# Altium PCB vnhsp30x3v3.PcbDoc
Units mil, origin at the board's own origin, x right, y up, seen from the top; angles counter-clockwise.
Board outline 3673.03 x 2151.03 mil, 2 copper layers (Top Layer, Bottom Layer); 72 components, 60 nets, 306 pads, 152 vias.
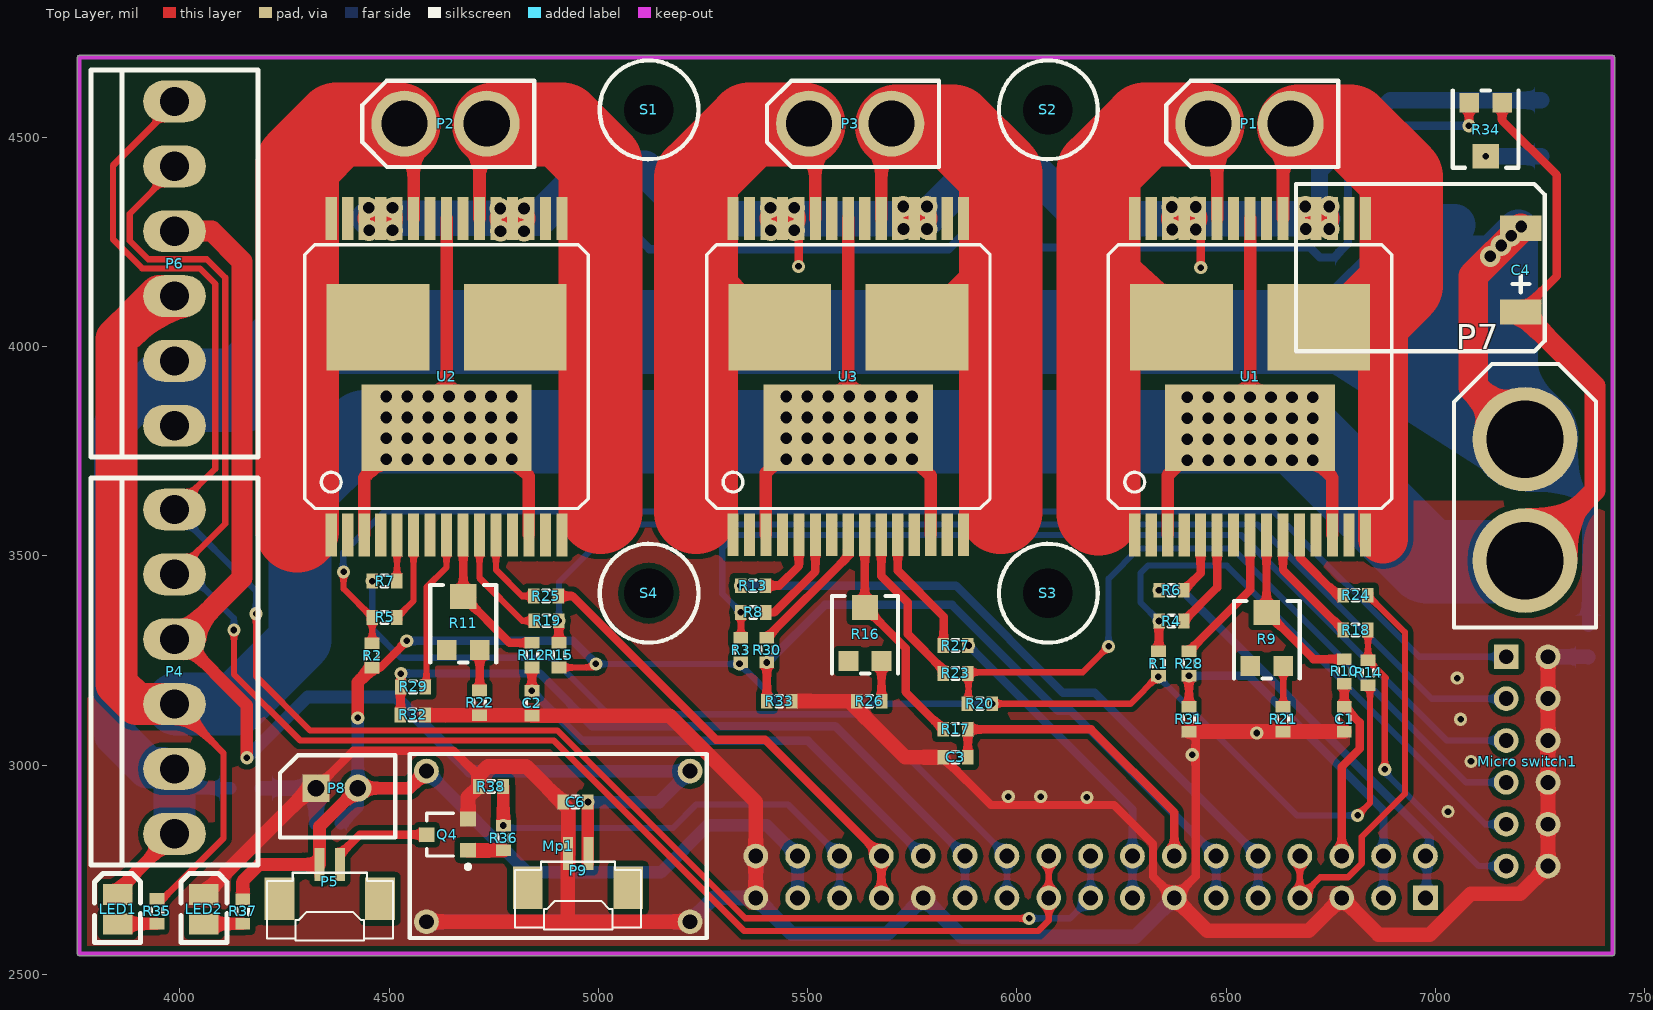
[diagram p0: Top Layer view]
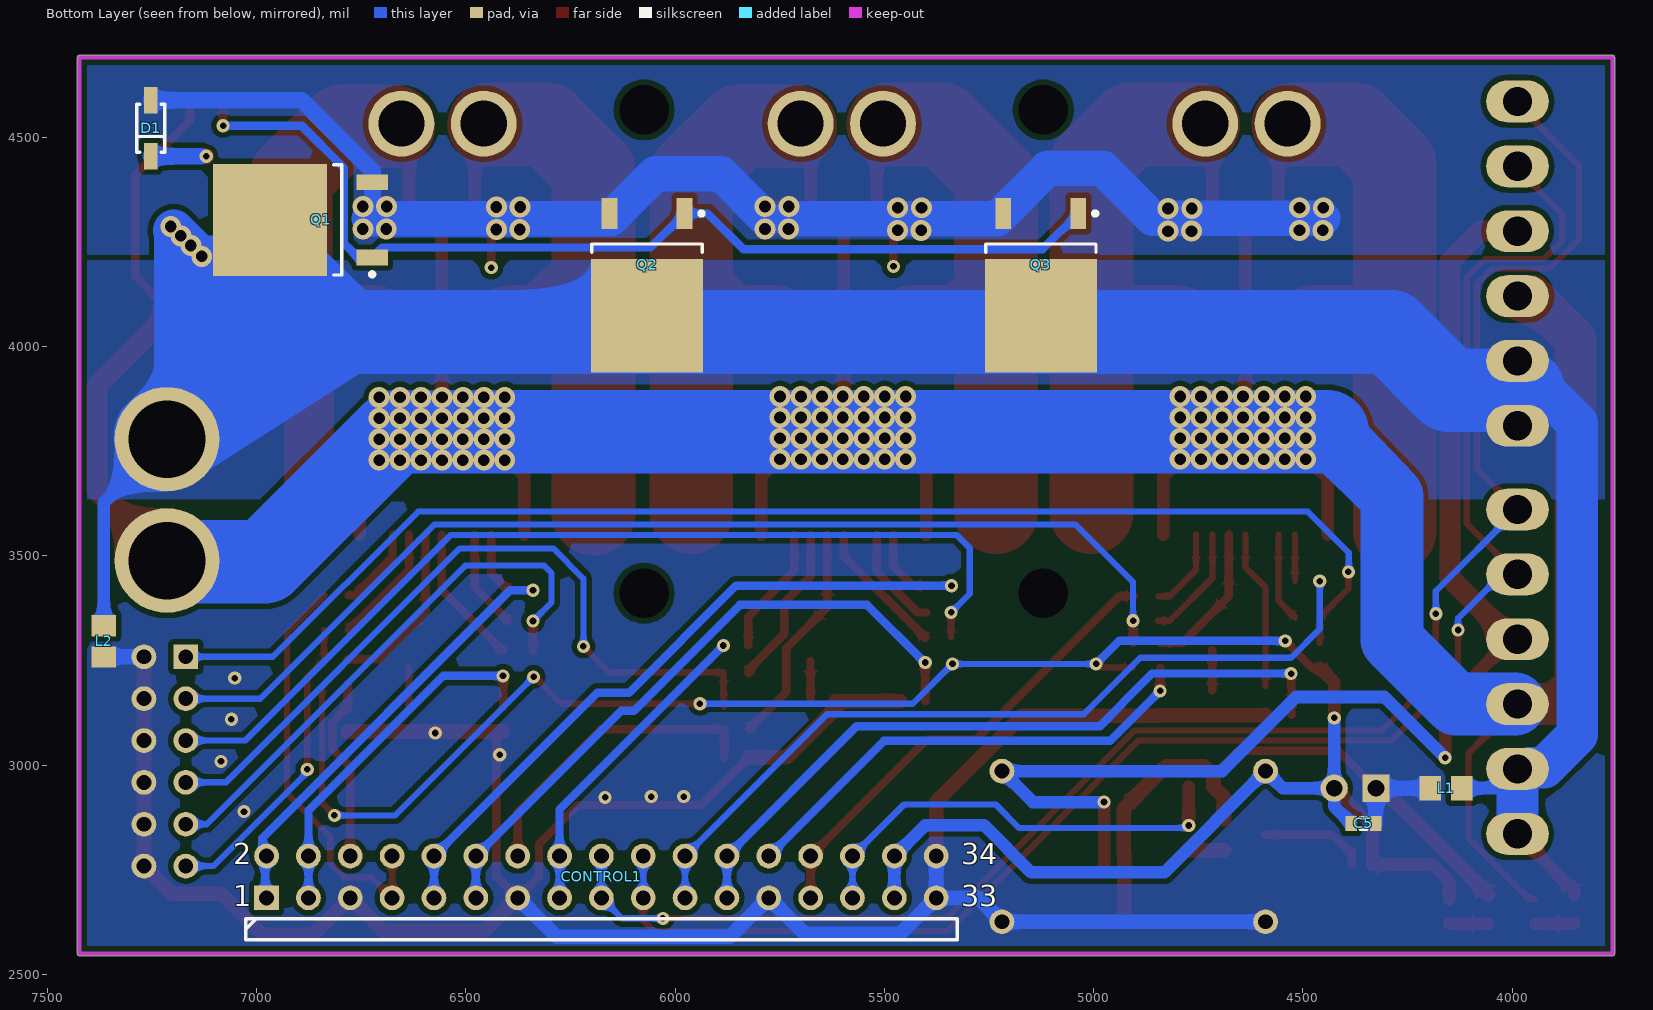
[diagram p1: Bottom Layer view, seen from below]

## Layer stack, top to bottom
Top Solder: solder mask 0.4, Solder Resist, Dk 3.5
Top Layer: signal copper 1.4
Dielectric 1: dielectric 12.6, FR-4, Dk 4.8
Bottom Layer: signal copper 1.4
Bottom Solder: solder mask 0.4, Solder Resist, Dk 3.5

## Board outline
3754.99,2550 ccw(c3760,2550) 3760,2544.99 7423,2544.99 ccw(c7423,2550) 7428.02,2550 7428.02,4691 ccw(c7423,4691) 7423,4696.02 3760,4696.02 ccw(c3760,4691) 3754.99,4691

## Design rules (kind name [scope] priority, off if disabled: settings)
AssemblyTestPointUsage [All] p1 off:
AssemblyTestpoint [All] p1 off: testpointundercomponent=TRUE minsize=40 maxsize=100 preferedsize=60 minholesize=0 maxholesize=40 preferedholesize=32 testpointgrid=1 usegrid=TRUE gridtolerance=0.01 allowsidetop=TRUE allowsidebottom=TRUE
Clearance Clearance_1 [All vs InPolygon] p1: gap=13 ignorepadtopadclearanceinfootprint=FALSE except(0: Arc-Hole Track-Hole SMDPad-Hole THPad-Hole Via-Hole Fill-Hole Poly-Hole Region-Hole Text-Hole)
Clearance [All] p2: gap=7 ignorepadtopadclearanceinfootprint=FALSE except(0: Arc-Hole Track-Hole SMDPad-Hole THPad-Hole Via-Hole Fill-Hole Poly-Hole Region-Hole Text-Hole)
ComponentClearance [All] p1 off: gap=10 collisioncheckmode=3 verticalgap=10 showdistances=FALSE
FabricationTestPointUsage [All] p1 off: valid=0 allowmultiple=FALSE
FabricationTestpoint [All] p1 off: side=3 testpointundercomponent=TRUE minsize=40 maxsize=100 preferedsize=60 minholesize=0 maxholesize=40 preferedholesize=32 testpointgrid=1 allowsidetop=TRUE allowsidebottom=TRUE usegrid=TRUE gridtolerance=0.01
Height [All] p1 off: minheight=0 maxheight=1000 prefheight=500
HoleSize [All] p1 off: absolutevalues=TRUE maxlimit=100 minlimit=1 maxpercent=80.000 minpercent=20.000
HoleToHoleClearance [All] p1 off: gap=10 allowstackedmicrovias=TRUE
LayerPairs [All] p1 off: enforce=TRUE
MinimumSolderMaskSliver [All] p1 off: minsoldermaskwidth=10
NetAntennae [All] p1 off: netantennaetolerance=0
PasteMaskExpansion [All] p1 off: expansion=0
PlaneConnect [All] p1: planeconnectstyle=Direct reliefexpansion=20 reliefentries=4 reliefconductorwidth=10 reliefairgap=10
PolygonConnect [All] p1: connectstyle=Direct reliefconductorwidth=10 reliefentries=4 polygonreliefangle="90 Angle" airgapwidth=10
RoutingVias [All] p1: holewidth=15.75 width=31.5 viastyle="Through Hole" minholewidth=11.81 minwidth=23.62 maxholewidth=28 maxwidth=50
SilkToSilkClearance [All] p1 off: silktosilkclearance=10
SilkToSolderMaskClearance [IsPad] p1 off: minsilkscreentomaskgap=10 clearancetoexposedcopper=TRUE
SolderMaskExpansion [All] p1 off: expansion=4
Width [All] p1: maxlimit=500 minlimit=10 preferedwidth=10
15 further rules are at their usual default settings.

## Components (designator, comment, footprint, x,y, rotation, side; value= is the part's Value field where it differs from the comment)
C1 "33nF" J1-0603 6782,3110 r90 top
C2 "33nF" J1-0603 4841,3148 r90 top
C3 "33nF" J1-0603 5853,3019 r0 top
C4 "Cap Pol1" "CAP 470uf sleep smd" 7013,4186 r90 top
C5 "100nF" J1-0603 4355,2861 r0 bottom
C6 "100nF" J1-0603 4945,2912 r0 top
CONTROL1 "" HDR2X17H 6976,2683 r180 bottom
D1 "BZT52C3V0" SOD123 7253,4522.07 r270 bottom
L1 "" 2012[0805] 4158,2945 r0 bottom
L2 "" 2012[0805] 7365,3296 r270 bottom
LED1 "power" 3518 3851,2656 r90 top
LED2 "power" 3518 4057,2656 r90 top
"Micro switch1" "" HDR2X6H 7169,3259 r270 top
Mp1 "Mp1584" mp1584-1.8 5258.92,3026 r180 top locked
P1 "XT30" xt-30 6354.79,4635.36 r270 top
P2 "XT30" xt-30 4433.79,4635.36 r270 top
P3 "XT30" xt-30 5400.64,4635.36 r270 top
P4 "BUS connector" CON6-TIWAN 3987,3223.5 r270 top
P5 "smd" "sheader 2" 4382.68,2762.69 r180 top
P6 "BUS connector" con6-tiwan 3987,4198.5 r270 top
P7 "XT60" XT-60 7207.4,3631.68 r180 top
P8 "jp_circular" "JP circular 2" 4325,2945 r0 top
P9 "smd" "sheader 2" 4976,2789 r180 top
Q1 "MOSFET-N" D-pack 6895,4303 r0 bottom
Q2 "MOSFET-N" D-pack 6067,4147 r270 bottom
Q3 "MOSFET-N" D-pack 5126,4147 r270 bottom
Q4 "2N2222" SOT-23 4639,2834 r90 top
R1 "Res1" j1-0603 6338,3243 r90 top
R2 "Res1" j1-0603 4459,3262 r90 top
R3 "Res1" j1-0603 5340,3275 r90 top
R4 "Res1" j1-0603 6369,3344.5 r0 top
R5 "Res1" j1-0603 4489,3353 r0 top
R6 "Res1" j1-0603 6369,3418 r0 top
R7 "Res1" j1-0603 4489,3440 r0 top
R8 "Res1" j1-0603 5370,3365 r0 top
R9 "pot" 35WR_TC33X-2-103E(Primary) 6597,3300 r0 top
R10 "Res1" j1-0603 6782,3224 r270 top
R11 "pot" 35WR_TC33X-2-103E(Primary) 4677,3338 r0 top
R12 "Res1" j1-0603 4840.94,3263 r270 top
R13 "Res1" j1-0603 5369,3429 r0 top
R14 "Res1" j1-0603 6839,3221 r90 top
R15 "Res1" j1-0603 4905.47,3263 r90 top
R16 "pot" 35WR_TC33X-2-103E(Primary) 5637,3312 r0 top
R17 "Res1" j1-0603 5853,3085.75 r0 top
R18 "Res1" j1-0603 6809,3323 r180 top
R19 "Res1" j1-0603 4876,3345 r180 top
R20 "Res1" j1-0603 5911,3147 r180 top
R21 "Res1" j1-0603 6636,3110 r270 top
R22 "Res1" j1-0603 4716,3149 r270 top
R23 "Res1" j1-0603 5853,3219.25 r180 top
R24 "Res1" j1-0603 6809,3406 r180 top
R25 "Res1" j1-0603 4874.53,3404 r180 top
R26 "Res1" j1-0603 5647,3153 r180 top
R27 "Res1" j1-0603 5853,3286 r180 top
R28 "Res1" j1-0603 6411,3243 r90 top
R29 "Res1" j1-0603 4557,3187 r0 top
R30 "Res1" j1-0603 5402,3275 r90 top
R31 "Res1" j1-0603 6411,3110 r270 top
R32 "Res1" j1-0603 4556,3120 r0 top
R33 "Res1" j1-0603 5432,3153 r0 top
R34 "20k" 35WR_TC33X-2-103E(Primary) 7120,4520 r180 top
R35 "Res1" j1-0603 3945,2651 r270 top
R36 "" j1-0603 4773,2826 r90 top
R37 "Res1" j1-0603 4150,2650.53 r270 top
R38 "" j1-0603 4743,2949 r180 top
S1 "Screw Hole" "Screw Holw 3-6 mm" 5121,4566 r0 top
S2 "Screw Hole" "Screw Holw 3-6 mm" 6075,4566 r0 top
S3 "Screw Hole" "Screw Holw 3-6 mm" 6075,3411 r0 top
S4 "Screw Hole" "Screw Holw 3-6 mm" 5121,3411 r0 top
U1 "VNH2SP30" MULTIPOWER30_VNH2SP30(Primary) 6557.02,3926.92 r270 top
U2 "VNH2SP30" MULTIPOWER30_VNH2SP30(Primary) 4637.02,3926.92 r270 top
U3 "VNH2SP30" MULTIPOWER30_VNH2SP30(Primary) 5597.02,3927 r270 top

## Footprints (in the part's own frame and the unit in brackets; to place one, negate y for a bottom-side part, rotate by r counter-clockwise, add the part's x,y. Pads: shape width x height; smd on the part's side, far side on the other; paste and mask are expansions set on the pad)
35WR_TC33X-2-103E(Primary) [mm]
  rect 1.2x1.2 smd paste-25.4 mask-25.4: 1(-1,-1.6) 3(1,-1.6)
  rect 1.6x1.5 smd paste-25.4 mask-25.4: 2(0,1.65)
  silkscreen extent -2,-2.35 2,2.35
2012[0805] [mm] "Chip Resistor; Body 2.0 x 1.3 mm (LxW typ)"
  rect 1.3x1.5 smd: 1(-0.95,0) 2(0.95,0)
  body extent -1.22,-0.75 1.28,0.75, height 0.5
3518 [mil]
  rect 50x70 smd: 1(35,0) 2(-35,0)
  silkscreen extent -80,-55 85,55, body extent -63,-31 63,32, height 43
"CAP 470uf sleep smd" [mil]
  rect 60x100 smd: 1(-103,-191) 2(97,-191)
  silkscreen extent -197,-248 203,346
CON6-TIWAN [mil]
  oval 100x150 hole 70: 1(-387.5,0) 2(-232.5,0) 3(-77.5,0) 4(77.5,0) 5(232.5,0) 6(387.5,0)
  silkscreen extent -463,-200 463,200
con6-tiwan [mil]
  oval 100x150 hole 70: 1(-387.5,0) 2(-232.5,0) 3(-77.5,0) 4(77.5,0) 5(232.5,0) 6(387.5,0)
  silkscreen extent -463,-200 463,200
D-pack [mm] "D-PAK, 3-Pads, Body 6.2x6.7mm (max), IPC Medium Density"
  rect 1.9x0.95 smd: 1(-4.35,2.28) 3(-4.35,-2.28)
  rect 6.9x6.8 smd: 4(1.85,0)
  silkscreen extent -4.47,-3.35 -2,3.43, body extent -2.5,-3.35 3.7,3.35, height 2.38
HDR2X6H [mm] "Connector; Header; 6x2 Position; Right Angle"
  rect 1.5x1.5 hole 0.9: 1(0,0)
  round 1.5 hole 0.9: 2(0,2.54) 3(2.54,0) 4(2.54,2.54) 5(5.08,0) 6(5.08,2.54) 7(7.62,0) 8(7.62,2.54) 9(10.16,0) 10(10.16,2.54) 11(12.7,0) 12(12.7,2.54)
HDR2X17H [mm] "Connector; Header; 17x2 Position; Right Angle"
  rect 1.5x1.5 hole 0.9: 1(0,0)
  round 1.5 hole 0.9: 2(0,2.54) 3(2.54,0) 4(2.54,2.54) 5(5.08,0) 6(5.08,2.54) 7(7.62,0) 8(7.62,2.54) 9(10.16,0) 10(10.16,2.54) 11(12.7,0) 12(12.7,2.54) 13(15.24,0) 14(15.24,2.54) 15(17.78,0) 16(17.78,2.54) 17(20.32,0) 18(20.32,2.54) 19(22.86,0) 20(22.86,2.54) 21(25.4,0) 22(25.4,2.54) 23(27.94,0) 24(27.94,2.54) 25(30.48,0) 26(30.48,2.54) 27(33.02,0) 28(33.02,2.54) 29(35.56,0) 30(35.56,2.54) 31(38.1,0) 32(38.1,2.54) 33(40.64,0) 34(40.64,2.54)
  silkscreen extent -1.27,-2.54 41.91,-1.27
J1-0603 [mm] "Chip Resistor, Body 1.6x0.8mm, IPC High Density"
  rect 0.7x0.9 smd: 1(-0.75,0) 2(0.75,0)
  silkscreen extent -0.2,-0.35 0.2,0.35, body extent -0.85,-0.48 0.85,0.48, height 0.9
j1-0603 [mm] "Chip Resistor, Body 1.6x0.8mm, IPC High Density"
  rect 0.7x0.9 smd: 1(-0.75,0) 2(0.75,0)
  silkscreen extent -0.2,-0.35 0.2,0.35, body extent -0.85,-0.48 0.85,0.48, height 0.9
"JP circular 2" [mil]
  rect 65x65 hole 40: 1(0,0)
  round 65 hole 40: 2(100,0)
  silkscreen extent -86,-118 190,79, body extent -96,-118 196,75, height 216
mp1584-1.8 [mm]
  round 1.5 hole 0.9: 1(1.016,10.16) 2(1.016,1.016) 3(17.016,10.16) 4(17.016,1.016)
  silkscreen extent 0,-0.03 18.03,11.15
MULTIPOWER30_VNH2SP30(Primary) [mm]
  rect 5.25x6.23 smd paste-25.4 mask-25.4: 35(-3.05,-4.165) 36(-3.05,4.165)
  rect 5.45x6.43 on Top Solder paste-25.4 mask-25.4: 35(-3.05,-4.165) 36(-3.05,4.165)
  rect 5.25x10.3 smd paste-25.4 mask-25.4: 37(3.05,0)
  rect 5.45x10.5 on Top Solder paste-25.4 mask-25.4: 37(3.05,0)
  rect 2.6x0.68 smd paste-25.4 mask-25.4: P$1(9.563,-7) P$2(9.563,-6) P$3(9.563,-5) P$4(9.563,-4) P$5(9.563,-3) P$6(9.563,-2) P$7(9.563,-1) P$8(9.563,0) P$9(9.563,1) P$10(9.563,2) P$11(9.563,3) P$12(9.563,4) P$13(9.563,5) P$14(9.563,6) P$15(9.563,7) P$16(-9.637,7) P$17(-9.637,6) P$18(-9.637,5) P$19(-9.637,4) P$20(-9.637,3) P$21(-9.637,2) P$22(-9.637,1) P$23(-9.637,0) P$24(-9.637,-1) P$25(-9.637,-2) P$26(-9.637,-3) P$27(-9.637,-4) P$28(-9.637,-5) P$29(-9.637,-6) P$30(-9.637,-7)
  silkscreen extent -8.04,-8.6 7.96,8.6
"Screw Holw 3-6 mm" [mil]
  round 0 hole 118.11: 0(-1,0)
  silkscreen extent -118,-118 118,118
"sheader 2" [mm]
  rect 1.8x2.6 smd: 0(-2.425,2.075) 0(3.675,2.075)
  rect 0.6x2 smd: 1(0,0) 2(1.25,0)
  silkscreen extent -3.2,0.5 4.45,4.62, body extent -3.2,-0.12 4.45,4.65, height 3.5
SOD123 [mm] "SOD-123; 2 Leads; Body 2.7 x 1.6 mm, (LxW)"
  rect 1.6x0.8 smd: 1(-1.7,0) 2(1.7,0)
  silkscreen extent -1.45,-0.85 1.45,0.85
SOT-23 [mm] "SOT-23; 3 Leads; Body 3.0 x 2.6 mm, inc. leads (LxW max)"
  rect 0.9x0.95 smd: 1(0,1.25) 2(-0.95,-1.25) 3(0.95,-1.25)
  silkscreen extent -2.07,-1.38 1.3,1.25, body extent -1.33,-0.38 1.33,1.25, height 2
xt-30 [mm]
  round 4 hole 2.8: +(2.6,7.6) -(2.6,2.6)
  silkscreen extent 0,0.05 5.23,10.49, body extent 0.01,0.01 5.26,10.46, height 13.5
XT-60 [mil]
  round 250 hole 185: +(-6.6,142.68) -(-6.6,-147.32)
  silkscreen extent -177,-327 163,303, body extent -162,-309 153,305, height 646

## Part data
C1 C2 C3 C5 C6: library part Cap, "Capacitor"
C4: "Polarized Capacitor (Radial)"
CONTROL1: library part "Header 17X2H", "Header, 17-Pin, Dual row, Right Angle"
D1: "Surface Mount Zener Diode"
L1 L2: library part Inductor, "Inductor"
LED1 LED2: library part LED3, "Typical BLUE SiC LED"
"Micro switch1": library part "Header 6X2H", "Header, 6-Pin, Dual row, Right Angle"
P1 P2 P3 P5 P7 P8 P9: library part "Header 2", "Header, 2-Pin"
P4 P6: library part "Header 6", "Header, 6-Pin"
Q1 Q2 Q3: "N-Channel MOSFET"
Q4: "NPN Bipolar Transistor"
R1 R2 R3 R4 R5 R6 R7 R8 R10 R12 R13 R14 R15 R17 R18 R19 R20 R21 R22 R23 R24 R25 R26 R27 R28 R29 R30 R31 R32 R33 R35 R37: "Resistor"
R9 R11 R16 R34: library part TC33X-2-103E
R36 R38: library part Res1, "Resistor"
U1 U2 U3: "Dip18"

## Via types
v1: diameter 50, hole 28, Top Layer to Bottom Layer, tented both sides, 112 vias
v2: diameter 31.5, hole 15.75, Top Layer to Bottom Layer, tented both sides, 40 vias

## Nets (pads, with @x,y where several pads share a name; then routed paths per layer and width w, separated by ;. In a path a pad name is that pad's centre, name@x,y a point inside that pad or via, vN(x,y) a via of type N, cw(c..) or ccw(c..) an arc to the next point about the centre after c; other vN are vias at no path point)
+5: C5.2 CONTROL1.31 CONTROL1.32 Mp1.4 P5.2 P8.2 R1.1 R2.1 R3.1 R14.1 R15.1 R20.1 R37.1 | length 5418.2
  Top Layer w15: R15.1 4985.47,3233.47 v2(4994,3242) ; v2(5940.53,3147) 6271.53,3147 R1.1 ; v2(6814,2880) 6843.5,2909.5 6843.5,3186.97 R14.1
  Top Layer w20: R2.1 4477.47,3232.47 v2(4542,3297)
  Top Layer w30: R37.1 4150,2723 4189.69,2762.69 P5.2 4333.47,2853.47 P8.2 4548,2945 Mp1.4 ; v2(4425,3113) 4425,3198.47 R2.1
  Bottom Layer w15: v2(4994,3242) v2(5337,3242) 5432,3147 v2(5940.53,3147) ; v2(6338,3211) 6669,2880 v2(6814,2880)
  Bottom Layer w20: v2(4542,3297) 4939,3297 v2(4994,3242)
  Bottom Layer w30: C5.2 4425,2901.47 P8.2 ; v2(4425,3113) P8.2 ; CONTROL1.31 CONTROL1.32 5402,2857 5262,2857 5149,2744 4831,2744 Mp1.4 4548,2945 P8.2
+12: C6.2 Mp1.2 P4.3 P6.3 P9.1 | length 3119.7
  Top Layer w30: P4.3@4002,3301 4160,3143 v2(4160,3018) ; P9.1@4974.21,2765 4974.53,2765.32 C6.2
  Top Layer w50: P4.3@3993,3301 4002,3301 4148,3447 4148,4204 4076,4276 P6.3@3993,4276
  Bottom Layer w30: v2(4160,3018) 4305,3163 4516,3163 4693,2986 Mp1.2 5144.92,2912 v2(4975,2912)
+16: C4.1 P4.4 P6.4 P7.+ R34.1 R35.1 U1.37@6557.02,3806.84 U1.P$3 U1.P$13 U1.P$23 U2.37@4637.02,3806.84 U2.P$3 U2.P$13 U2.P$23 U3.37@5597.02,3806.92 U3.P$3 U3.P$13 U3.P$23 | length 9585.6
  Top Layer w15: R35.1 3959.53,2680.53 4104,2825 4104,3029 P4.4
  Top Layer w20: R34.1 7159.37,4540.63 7290,4410 7290,4169 C4.1
  Top Layer w30: U2.P$3 4440.17,3687.17 U2.37@4474,3721 ; U2.37@4637.02,3806.84 U2.P$23 ; v1(4793,3731) 4833.87,3690.13 U2.P$13 ; U3.P$3 5400.17,3698.17 U3.37@5448,3746 ; U3.37@5597.02,3806.92 U3.P$23 ; U3.37@5758,3728 5793.87,3692.13 U3.P$13 ; U1.P$3 6360.17,3693.17 U1.37@6392,3725 ; U1.P$23 6557.02,3806.84 U1.37@6570.93,3792.93 ; U1.37@6718,3723 6753.87,3687.13 U1.P$13
  Top Layer w50: C4.1 7381,3906 7381,3656 P7.+
  Top Layer w100: P4.4@3993,3146 P4.4 3896,3146 3848,3194 3848,4018 3951,4121 P6.4 P6.4@3993,4121
  Bottom Layer w150: P4.4@3993,3146 4134,3146 4287,3299 4287,3642 4442,3797
  Bottom Layer w200: 4442,3797 4643,3797 4793,3797 5549,3797 5649,3797 6407,3797 6557,3797 6670,3797 6697.5,3769.5 6981,3486 P7.+@7205,3486
  other v1: 6407,3729 6457,3729 6507,3729 6557,3729 6607,3729 6657,3729 6707,3729 4493,3731 4543,3731 4593,3731 4643,3731 4693,3731 4743,3731 5449,3731 5499,3731 5549,3731 5599,3731 5649,3731 5699,3731 5749,3731 6407,3779 6457,3779 6507,3779 6557,3779 6607,3779 6657,3779 6707,3779 4493,3781 4543,3781 4593,3781 4643,3781 4693,3781 4743,3781 4793,3781 5449,3781 5499,3781 5549,3781 5599,3781 5649,3781 5699,3781 5749,3781 6407,3829 6457,3829 6507,3829 6557,3829 6607,3829 6657,3829 6707,3829 4493,3831 4543,3831 4593,3831 4643,3831 4693,3831 4743,3831 4793,3831 5449,3831 5499,3831 5549,3831 5599,3831 5649,3831 5699,3831 5749,3831 6407,3879 6457,3879 6507,3879 6557,3879 6607,3879 6657,3879 6707,3879 4493,3881 4543,3881 4593,3881 4643,3881 4693,3881 4743,3881 4793,3881 5449,3881 5499,3881 5549,3881 5599,3881 5649,3881 5699,3881 5749,3881
CURRENT1: C2.2 CONTROL1.26 R12.2 | length 1154.4
  Top Layer w20: R12.2 4840.95,3177.58 v2(4841,3177.53)
  Bottom Layer w20: v2(4841,3177.53) 4960.53,3058 5501,3058 CONTROL1.26
Current2: C1.2 CONTROL1.6 R10.2 | length 444.6
  Top Layer w20: CONTROL1.6 6776,2996 6819,3039 6819,3102.53 C1.2 R10.2
Current3: C3.2 CONTROL1.14 R17.2 | length 746.5
  Top Layer w20: C3.2 R17.2 6177.25,3085.75 6376,2887 CONTROL1.14
D+: CONTROL1.17 CONTROL1.18 P4.1 P6.1 | length 4093.4
  Top Layer w15: P4.1 4084,3708 4084,4150 4047,4187 3910,4187 3840,4257 3840,4433 P6.1@3993,4586 ; v2(4182,3362) 4182,3212 4311.25,3082.75 4902.25,3082.75 5351,2634 v2(6029,2634)
  Bottom Layer w15: P4.1 4182,3416 v2(4182,3362) ; v2(6029,2634) 6127,2634 CONTROL1.17 CONTROL1.18
D-: CONTROL1.19 CONTROL1.20 P4.2 P6.2 | length 4043.3
  Top Layer w15: P4.2 4108,3577 4108,4165.11 4064.11,4209 3924,4209 3880,4253 3880,4318 P6.2@3993,4431 ; v2(4129,3323) 4129,3217 4287,3059 4893,3059 5348.25,2603.75 6050.75,2603.75 6076,2629 CONTROL1.19 CONTROL1.20
  Bottom Layer w15: P4.2 4024,3456 4129,3351 v2(4129,3323) ; CONTROL1.19@6069,2676 CONTROL1.19 CONTROL1.20
EN1-1: "Micro switch1.1" R2.2 R5.1 | length 3207.7
  Top Layer w15: v2(4391,3462) 4391,3421.47 R5.1 R2.2@4459.47,3292
  Bottom Layer w15: v2@4390,3462 4390,3508 4488,3606 6614,3606 6961,3259 7169,3259
EN1-2: "Micro switch1.9" R1.2 R4.1 | length 1343.9
  Top Layer w20: R1.2@6339.47,3271 v2(6339.47,3344.5)
  Bottom Layer w15: v2(6339.47,3344.5) 6295,3388.97 6295,3459 6313,3477 6501,3477 7119,2859 7169,2859
EN1-3: "Micro switch1.5" R3.2 R8.1 | length 2321.6
  Top Layer w15: R3.2@5340.47,3305 v2(5340.47,3365)
  Bottom Layer w15: v2(5340.47,3365) 5296,3409.47 5296,3519 5327,3550 6536,3550 7027,3059 7169,3059
EN2-1: "Micro switch1.3" R15.2 R19.1 | length 2637.8
  Top Layer w20: R15.2@4905.53,3292.58 R15.2 4905.47,3344.94 v2(4905.53,3345)
  Bottom Layer w15: v2(4905.53,3345) 4905.53,3437.53 5043,3575 6575,3575 6991,3159 7169,3159
EN2-2: "Micro switch1.11" R14.2 R18.1 | length 741.2
  Top Layer w15: R18.1 6839,3322.53 R14.2 6881,3208.53 6879,3206.53 v2(6879,2990)
  Bottom Layer w15: v2(6879,2990) 6879,2983 7103,2759 7169,2759
EN2-3: "Micro switch1.7" R20.2 R23.1 | length 1816.4
  Top Layer w15: R20.2@5883.06,3140 5884,3140.94 5884,3222 6157,3222 v2(6219,3284)
  Bottom Layer w15: v2(6219,3284) 6219,3446 6291,3518 6514,3518 7073,2959 7169,2959
Fan_5v: P5.1 Q4.1 | length 250.7
  Top Layer w20: P5.1 4382.68,2786.68 4430,2834 Q4.1
Fan_EN: CONTROL1.29 CONTROL1.30 R36.2 R38.1 | length 1074
  Top Layer w30: R38.1 v2(4772.53,2856) R36.2
  Bottom Layer w15: v2(4772.53,2856) 4778.78,2849.75 5177.75,2849.75 5234,2906 5453,2906 CONTROL1.30 CONTROL1.29
GND: "Micro switch1.2" "Micro switch1.4" "Micro switch1.6" "Micro switch1.8" "Micro switch1.10" "Micro switch1.12" C1.1 C2.1 C3.1 C5.1 C6.1 CONTROL1.5 CONTROL1.13 CONTROL1.25 CONTROL1.33 CONTROL1.34 L1.2 L2.2 LED2.1 Mp1.1 Mp1.3 P8.1 P9.2 Q4.3 R21.2 R22.2 R26.2 R31.2 R32.2 R33.2 R38.2 | length 9107.3
  Top Layer w20: P8.1 4414.5,3034.5 4653.44,3034.5 4713.47,2974.47 ; C3.1 5937.47,2905 6232,2905 6325,2812 6325,2734 CONTROL1.13 6427,2734 6427,3064.47 R31.2
  Top Layer w35: LED2.1 4311,2945 P8.1 ; Mp1.3 4931,2626 ; R32.2@4590,3120 4591,3119 C2.1@4841,3119 ; Q4.3 4688.21,2923.74 R38.2 4713.47,2974.47 4736,2997 4827,2997 4928,2896 P9.2@4928,2789 ; C2.1 5170.53,3118.47 5376,2913 CONTROL1.34 CONTROL1.33 ; P9.2 4926.79,2630.21 4931,2626 ; Mp1.1 4931,2626 ; R33.2 5599,3153 ; R26.2 5599,3153 ; C3.1 5733,3019 5599,3153 ; CONTROL1.13 6455,2604 6697,2604 CONTROL1.5 6864,2595 6986,2595 7084,2693 7203,2693 7269,2759 7269,2859 7269,2959 7269,3059 7269,3159 7269,3259 ; R31.2 C1.1
  Bottom Layer w35: L1.2 P8.1 4325.47,2944.53 C5.1 ; Mp1.3 Mp1.1 5275.92,2683 CONTROL1.33 ; CONTROL1.34 CONTROL1.33 ; CONTROL1.13 6283,2590 5869,2590 CONTROL1.25 5690,2597 5462,2597 CONTROL1.33 ; 7269,3259 7364.6,3259 L2.2
  other v2: 7030,2889 6167,2923 5979,2925 6057,2925 7085,3009 6419,3025 6573,3077 7060,3110 7052,3208
ICINA-1: CONTROL1.21 CONTROL1.22 R7.1 | length 1955.7
  Bottom Layer w15: v2(4459.47,3440) 4459.47,3325.53 4528,3257 4888,3257 5023,3122 5637,3122 CONTROL1.22 CONTROL1.21
ICINA-2: CONTROL1.1 CONTROL1.2 R6.1 | length 1035.1
  Bottom Layer w20: v2(6339.47,3418) 6394,3418 6986,2826 6982.96,2782.51 CONTROL1.1
ICINA-3: CONTROL1.9 CONTROL1.10 R13.1 | length 1604.1
  Bottom Layer w20: v2(5339.47,3429) 5854,3429 6110,3173 6186,3173 CONTROL1.10 CONTROL1.9
ICINB-1: CONTROL1.27 CONTROL1.28 R25.1 | length 1129.2
  Top Layer w20: R25.1 4938,3404 5281,3061 5398,3061 CONTROL1.28 CONTROL1.27
ICINB-2: CONTROL1.7 CONTROL1.8 R24.1 | length 1002.3
  Top Layer w15: CONTROL1.8 CONTROL1.7 6725,2732 6790.97,2732 6824,2765.03 6824,2829 6927,2932 6927,3317.53 R24.1
ICINB-3: CONTROL1.15 CONTROL1.16 R27.1 | length 765.2
  Bottom Layer w20: v2(5884.53,3286) 6276,2894.53 CONTROL1.16 CONTROL1.15
ICPWM-1: CONTROL1.23 CONTROL1.24 R29.1 R32.1 | length 1728.8
  Top Layer w20: R32.1 4527,3120.53 R29.1@4527,3187 ; R29.1 4528,3187.53 v2(4528,3219)
  Bottom Layer w20: v2(4528,3219) 4860.31,3219 4930.75,3148.56 4930.75,3147.25 4985,3093 5566,3093 CONTROL1.24 CONTROL1.23
ICPWM-2: CONTROL1.3 CONTROL1.4 R28.1 R31.1 | length 881.1
  Top Layer w20: R31.1 v2(6411,3213.47)
  Bottom Layer w20: v2(6411,3213.47) 6554.53,3213.47 6876,2892 CONTROL1.4 CONTROL1.3
ICPWM-3: CONTROL1.11 CONTROL1.12 R30.1 R33.1 | length 1571.7
  Top Layer w20: v2(5402,3245.47) 5402.47,3245 R33.1
  Bottom Layer w20: v2@5402.74,3244.74 5541,3383 5845,3383 6098,3130 6129,3130 CONTROL1.12 CONTROL1.11
mosfet_gat: Q1.1 Q2.1 Q3.1 R34.3 | length 2449
  Top Layer w20: v2(7080,4528) 7080,4582.36 R34.3
  Bottom Layer w20: Q3.1 5121.5,4233 5837,4233 5922.26,4318.26 Q2.1 6058.5,4237 6699.98,4237 Q1.1 6757.24,4213.24 6791,4247 6791,4427 6892,4528 v2(7080,4528)
NetD1_2: D1.2 R34.2 | length 121.2
  Top Layer w40: R34.2 v2(7120.14,4455.14)
  Bottom Layer w40: v2@7132,4455.14 D1.2
NetLED1_1: LED1.2 R35.2 | length 94.2
  Top Layer w30: LED1.2 3944.53,2621 R35.2
NetLED2_1: LED2.2 R37.2 | length 93
  Top Layer w30: LED2.2 R37.2
NetQ4_2: Q4.2 R36.1 | length 84.8
  Top Layer w35: Q4.2 4772.87,2796.6 R36.1
NetR4_2: R4.2 U1.P$6 | length 239
  Top Layer w20: R4.2 6478.28,3424.26 U1.P$6
NetR5_2: R5.2 U2.P$6 | length 213.9
  Top Layer w15: R5.2 4558.28,3392.76 U2.P$6
NetR6_2: R6.2 U1.P$5 | length 149.2
  Top Layer w20: R6.2 6438.91,3458.39 U1.P$5
NetR7_2: R7.2 U2.P$5 | length 110.6
  Top Layer w15: R7.2 4518.53,3550.04 U2.P$5
NetR8_2: R8.2 U3.P$6 | length 246.7
  Top Layer w20: R8.2 5420,3365 5518.28,3463.28 U3.P$6
NetR9_2: R9.3 R21.1 | length 97.6
  Top Layer w15: R21.1 6636.37,3139.9 R9.3
NetR9_3: R9.2 R10.1 U1.P$9 | length 416.9
  Top Layer w20: U1.P$9 6596.39,3365.57 R9.2 6708.43,3253.53 R10.1
NetR11_2: R11.3 R22.1 | length 96.6
  Top Layer w20: R22.1 4716.37,3178.9 R11.3
NetR11_3: R11.2 R12.1 U2.P$9 | length 357.4
  Top Layer w20: U2.P$9 4677,3549.82 R11.2 4787.43,3292.53 R12.1
NetR13_2: R13.2 U3.P$5 | length 174.4
  Top Layer w20: R13.2 5432,3429 5478.91,3475.91 U3.P$5
NetR16_2: R16.3 R26.1 | length 96.1
  Top Layer w20: R16.3 5676.37,3153.16 R26.1
NetR16_3: R16.2 R17.1 U3.P$9 | length 542.2
  Top Layer w20: U3.P$9 5636.39,3377.57 R16.2 5712,3301.96 5712,3301.82 5734,3279.82 5734,3175.22 R17.1
NetR18_2: R18.2 U1.P$10 | length 286.9
  Top Layer w20: U1.P$10 6635.76,3466.71 R18.2
NetR19_2: R19.2 U2.P$10 | length 276.2
  Top Layer w15: U2.P$10 4715.76,3447.24 4818,3345 R19.2
NetR23_2: R23.2 U3.P$10 | length 392.4
  Top Layer w20: U3.P$10 5675.76,3452.24 5739,3389 5739,3313 5823.47,3228.53 R23.2
NetR24_2: R24.2 U1.P$11 | length 195.5
  Top Layer w20: U1.P$11 6675.13,3496.87 6766,3406 R24.2
NetR25_2: R25.2 U2.P$11 | length 199.5
  Top Layer w15: U2.P$11 4755.13,3466.87 4818,3404 R25.2
NetR27_2: R27.2 U3.P$11 | length 310
  Top Layer w20: U3.P$11 5715.13,3464.87 5824.94,3355.06 R27.2@5824.94,3286
NetR28_2: R28.2 U1.P$8 | length 338.4
  Top Layer w20: R28.2 6557.02,3418.55 U1.P$8
NetR29_2: R29.2 U2.P$8 | length 382.3
  Top Layer w15: R29.2@4589,3188 4589,3425 4637.02,3473.02 U2.P$8
NetR30_2: R30.2 U3.P$8 | length 326.8
  Top Layer w20: R30.2 5597.02,3499.55 U3.P$8
OUT_A-1: P1.- U1.35@6393.05,4047 U1.P$1 U1.P$25 U1.P$30 | length 1597.3
  Top Layer w30: P1.-@6444,4531 6478.28,4496.72 U1.P$25
  Top Layer w200: 6195,3601 6195,4159 ; U1.35@6393.05,4047 6307,4047 6195,4159 ; P1.-@6444,4531 6306,4531 6195,4420 6195,4159
OUT_A-2: P2.- U2.35@4473.05,4047 U2.P$1 U2.P$25 U2.P$30 | length 1481.1
  Top Layer w30: P2.-@4522,4531 4558.28,4494.72 U2.P$25
  Top Layer w200: 4280,3560 4280,4436 4375,4531 P2.-@4522,4531 ; U2.35@4389,4047 U2.35@4473.05,4047
OUT_A-3: P3.- U3.35@5433.05,4047.08 U3.P$1 U3.P$25 U3.P$30 | length 1576.7
  Top Layer w30: P3.-@5490,4531 5518.28,4502.72 U3.P$25
  Top Layer w200: 5233,3605 5233,4125 ; U3.35@5433.05,4047.08 5310.92,4047.08 5233,4125 ; P3.-@5490,4531 5361,4531 5233,4403 5233,4125
OUT_B-1: P1.+ U1.36@6721,4047 U1.P$15 U1.P$16 U1.P$21 | length 1594.1
  Top Layer w30: U1.P$21 6635.76,4489.76 P1.+@6673,4527
  Top Layer w120: 6875,3542 6875,4047 6875,4104 6875,4108
  Top Layer w200: P1.+@6673,4527 6796,4527 6918,4405 6918,4147 6875,4104 6818,4047 U1.36@6721,4047
OUT_B-2: P2.+ U2.36@4801,4047 U2.P$15 U2.P$16 U2.P$21 | length 1581.8
  Top Layer w30: U2.P$21 4715.76,4496.76 P2.+@4750,4531
  Top Layer w200: P2.+@4750,4531 4912,4531 5005,4438 5005,4077 ; U2.36@4801,4047 4975,4047 5005,4077 ; 5005,3605 5005,4077
OUT_B-3: P3.+ U3.36@5761,4047.08 U3.P$15 U3.P$16 U3.P$21 | length 1575.7
  Top Layer w30: U3.P$21 5675.76,4489.76 P3.+@5713,4527
  Top Layer w200: P3.+@5713,4527 5847,4527 5961,4413 5961,4135 ; U3.36@5761,4047.08 5873.08,4047.08 5961,4135 ; 5961,3605 5961,4135
PGND: C4.2 L1.1 L2.1 LED1.1 P4.5 P4.6 P6.5 P6.6 P7.- Q1.4 Q2.4 Q3.4 | length 6453.1
  Top Layer w30: LED1.1 3851,2700 P4.6
  Top Layer w70: C4.2 7090,4169 7090,3903 P7.-
  Bottom Layer w30: P4.5@3959,2994 3987,2966 4008,2945 L1.1 ; P7.- 7365,3628 L2.1
  Bottom Layer w100: 3923,3896 3844,3817 3844,3073 3923,2994 P4.5@3959,2994 ; P4.6 P4.5@3987,2966 ; Q1.4@6947.64,4218.15 Q1.4@6952.63,4211.46 ; Q1.4@6965.83,4216 6965.83,4291 Q1.4@7045.83,4291 ; v1@7198,4278 7136,4216 v1(7131,4216) 6970.83,4216 6966.29,4211.46 Q1.4@6952.63,4211.46 ; Q1.4@6952.63,4211.46 6949.46,4211.46 6957.27,4205.24 Q1.4@6952.63,4211.46
  Bottom Layer w170: 6758.72,4035 Q1.4@6947.64,4218.15 ; 6850.07,3990.85 Q1.4@7039,4174
  Bottom Layer w200: 3974,3896 4151,3896 4290,4035 6758.72,4035
  other v1: 7157,4242 7181,4265 7205,4287
VNHPGND: D1.1 Q1.3 Q2.3 Q3.3 U1.P$18 U1.P$19 U1.P$20 U1.P$26 U1.P$27 U1.P$28 U2.P$18 U2.P$19 U2.P$20 U2.P$26 U2.P$27 U2.P$28 U3.P$18 U3.P$19 U3.P$20 U3.P$26 U3.P$27 U3.P$28 | length 3482.8
  Top Layer w20: v2(5478,4192) 5478.91,4192.91 U3.P$26 ; U1.P$26 6438.91,4189.09 v2(6439,4189)
  Top Layer w85: U2.P$27@4467.04,4306.33 U2.P$27 U2.P$27@4491,4306.33 ; U2.P$19@4782,4306.33 U2.P$19 U2.P$19@4807,4306.33 ; U3.P$27@5427.04,4306.41 U3.P$27 5453,4306.41 ; U3.P$19 5768,4306.41 ; U1.P$27@6387.04,4306.33 U1.P$27 6413.04,4306.33 ; U1.P$19 6728,4306.33
  Bottom Layer w40: 6723,4308 6723,4420 6892,4589 D1.1
  Bottom Layer w85: 4452,4307 4859,4307 4978,4426 5110,4426 5230,4306 5409,4306 ; 5410,4306 5728,4306 5729,4306 ; 5783,4306 5890,4413 6047,4413 6154.24,4305.76 6371,4305.76 ; 6372,4305.76 6731,4305.76
  other v1: 4766,4276 4822,4276 4452,4278 4508,4278 5412,4278 5468,4278 6371,4280 6427,4280 5729,4281 5785,4281 6690,4281 6746,4281 4765,4330 4822,4330 4451,4332 4508,4332 5411,4332 5468,4332 6370,4334 6427,4334 5728,4335 5785,4335 6689,4335 6746,4335
pads on no net: P5.0 P9.0 R9.1 R11.1 R16.1 S1.0 S2.0 S3.0 S4.0 U1.35@6393.05,4047 U1.36@6721,4047 U1.37@6557.02,3806.84 U1.P$2 U1.P$4 U1.P$7 U1.P$12 U1.P$14 U1.P$17 U1.P$22 U1.P$24 U1.P$29 U2.35@4473.05,4047 U2.36@4801,4047 U2.37@4637.02,3806.84 U2.P$2 U2.P$4 U2.P$7 U2.P$12 U2.P$14 U2.P$17 U2.P$22 U2.P$24 U2.P$29 U3.35@5433.05,4047.08 U3.36@5761,4047.08 U3.37@5597.02,3806.92 U3.P$2 U3.P$4 U3.P$7 U3.P$12 U3.P$14 U3.P$17 U3.P$22 U3.P$24 U3.P$29

## Polygon pours and split planes (outlines as drawn)
GND on Bottom Layer "Bottom Layer-No Net" (solid, remove dead copper, pour order 15): 3760,2550 3760,3635 3765,3630 7423,3630 7423,2550
VNHPGND on Bottom Layer "Bottom Layer-No Net" (solid, remove dead copper, pour order 12): 7421,4217 7423,4219 7423,4691 3760,4691 3759,4690 3759,4216
PGND on Bottom Layer "Bottom Layer-No Net" (solid, remove dead copper, pour order 10): 7423,3635 3758,3635 3758,4159 3761,4162 3758,4165 3758,4207 7423,4207
GND on Top Layer "Bottom Layer-No Net" (solid, remove dead copper, pour order 13): 7423,2550 7423,3631 7422,3632 3760,3632 3760,2550

## Keep-outs
Keep-Out Layer:
  lines w10: 3760,2550 3760,4691 7423,4691 7423,2550 3760,2550

## Other copper
Bottom Layer:
  region net PGND: 7244,4281 7244,3970.42 ccw(c7344,3970.42) 7273.29,3899.71 7322,3851 cw(c7213.47,3783.25) 7110,3708 6749,3939 7203.77,4249.59

## Silkscreen, mask and mechanical layers (free items; w line width, h text height)
Top Solder:
  text "Robotic Teams" at 7375,2707 h40 r90
  text "KN2C" at 7137,2593 h60
Bottom Solder:
  lines w100: 3989,3147 3898,3147 3850,3195 3850,4019 3953,4122 3989,4122
  lines w130: 3991,3146 4132,3146 4285,3299 4285,3642 4440,3797 4741,3797 5547,3797 6555,3797 6668,3797 6695.5,3769.5 6979,3486 7214,3486
  lines w150: 3998,3898 4150,3898 4289,4037 7013,4037 7214,3836 7214,3779 ; 6960,4070 6960,4247

## Text inside footprints (layer, text, board x,y; h text height)
CONTROL1: Bottom Overlay "34" at 5316,2763 h50; Bottom Overlay "33" at 5316,2663 h50; Bottom Overlay "1" at 7056,2663 h50; Bottom Overlay "2" at 7056,2763 h50